# Altium PCB smart-clock-main-board.PcbDoc
Units mm, origin at the board's own origin, x right, y up, seen from the top; angles counter-clockwise.
Board outline 100 x 50 mm, 4 copper layers (Top Layer, Int1 (GND), Int2 (PWR), Bottom Layer), stack 1.369 mm thick; 26 components, 19 nets, 118 pads, 0 vias.
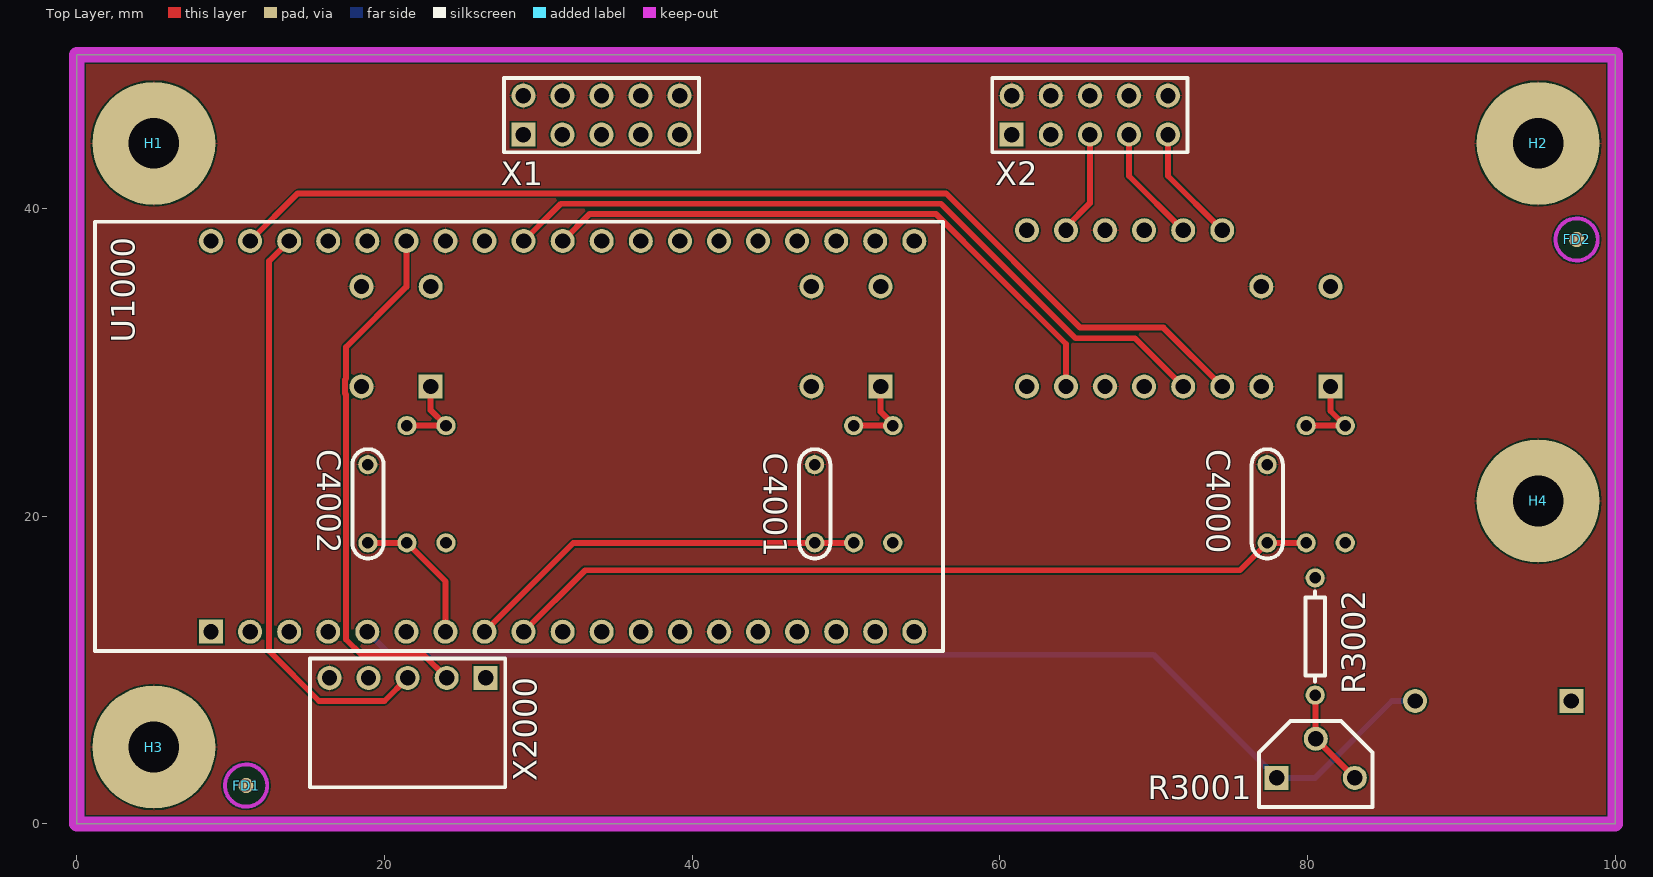
[diagram p0: Top Layer view]
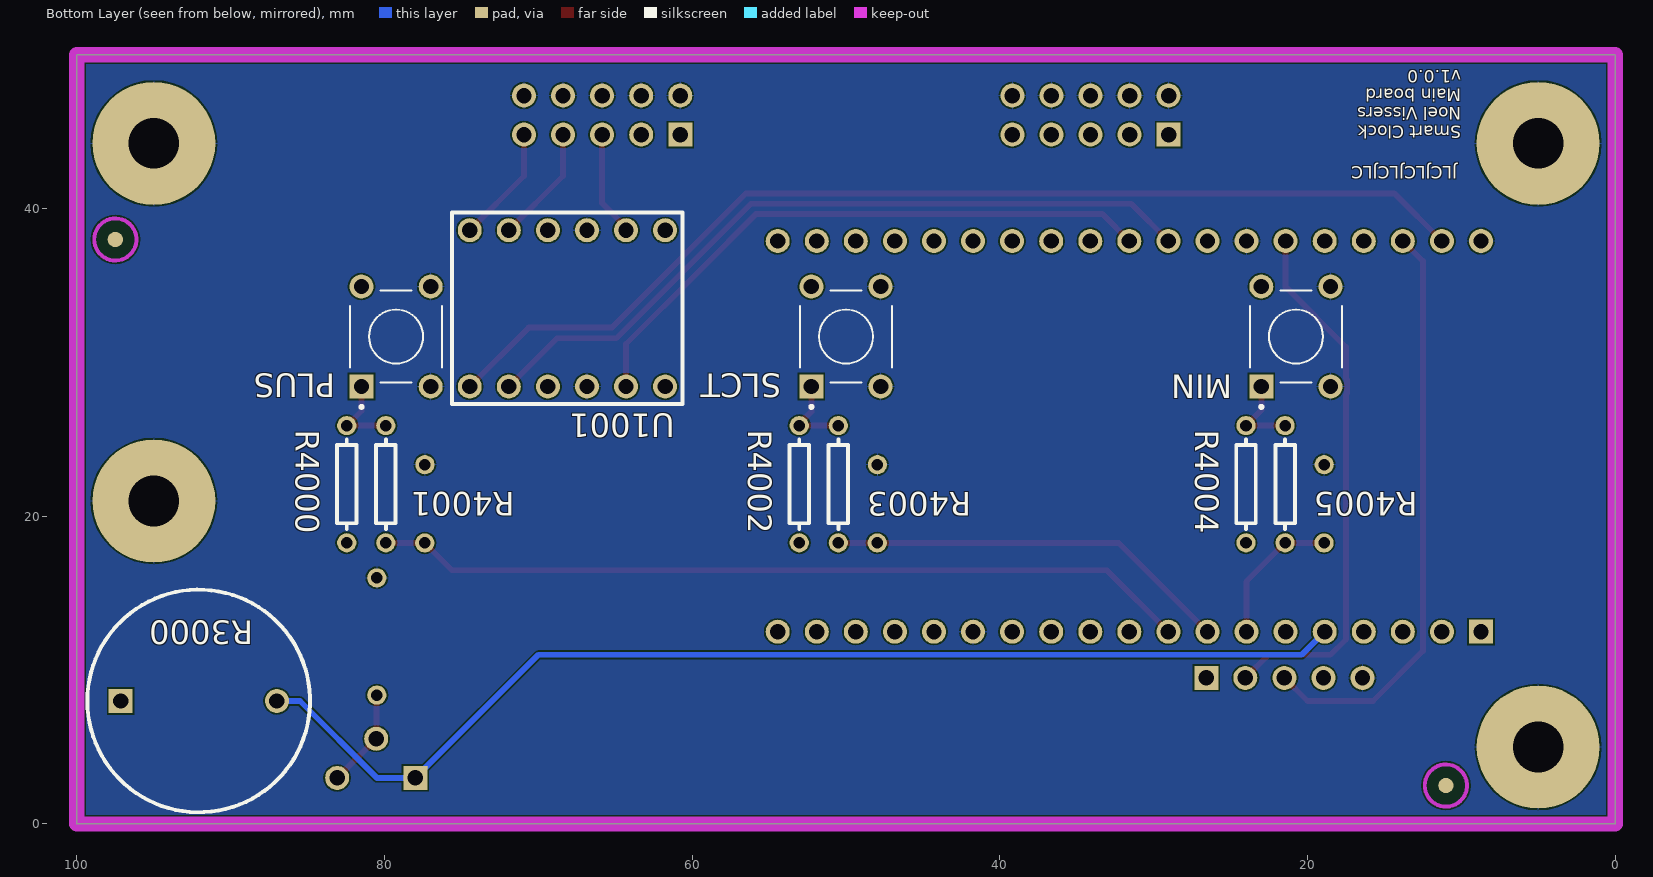
[diagram p1: Bottom Layer view, seen from below]
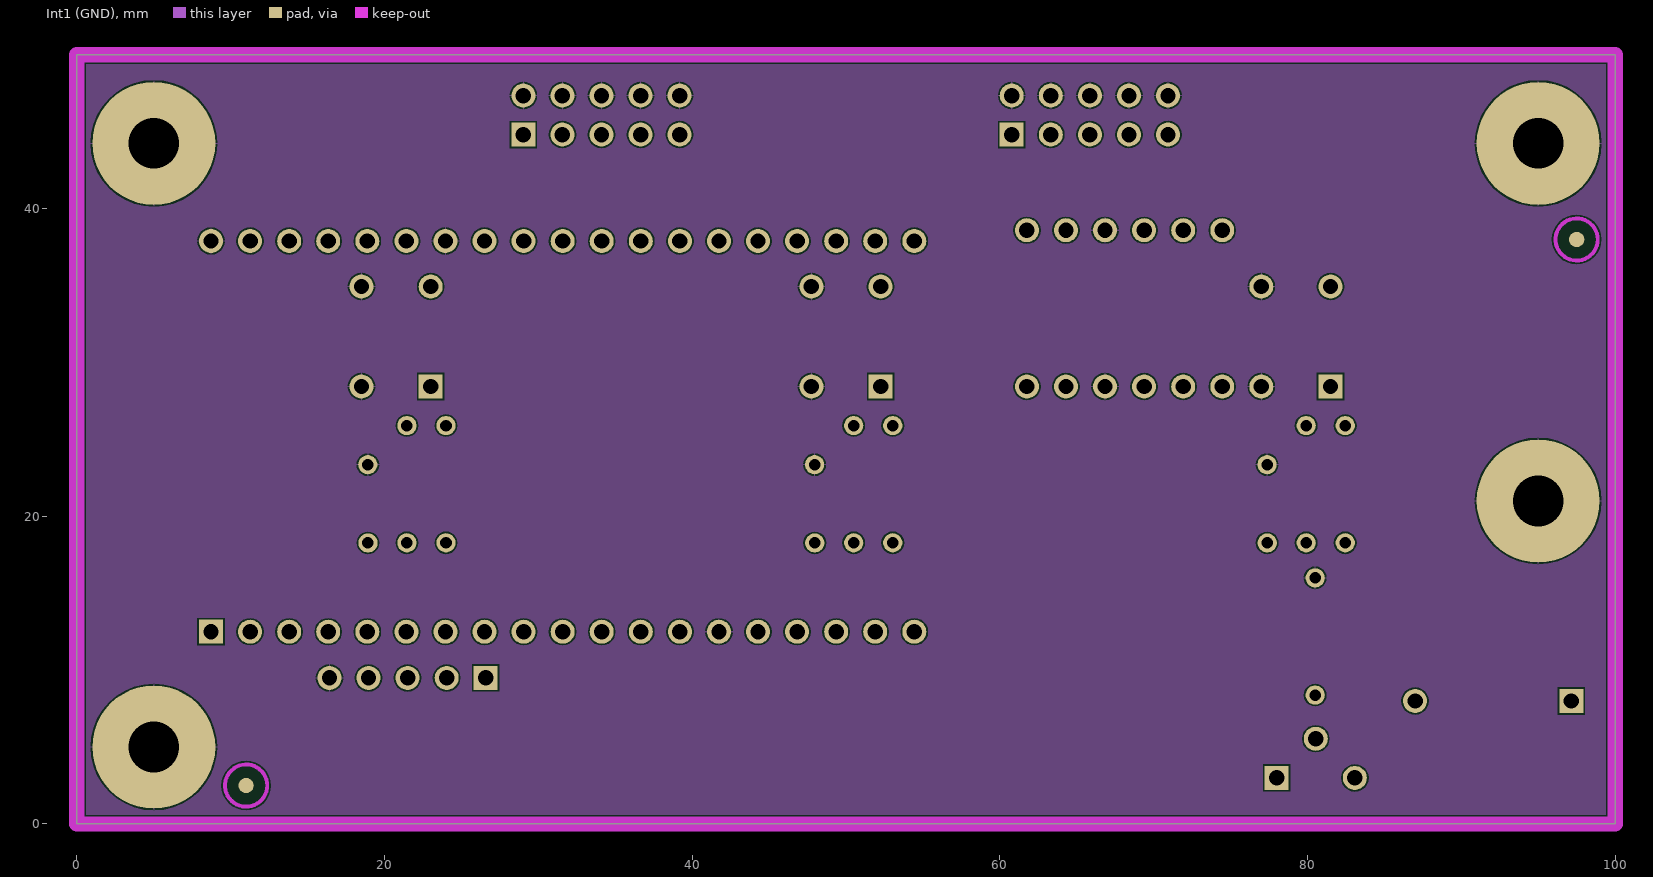
[diagram p2: Int1 (GND)]
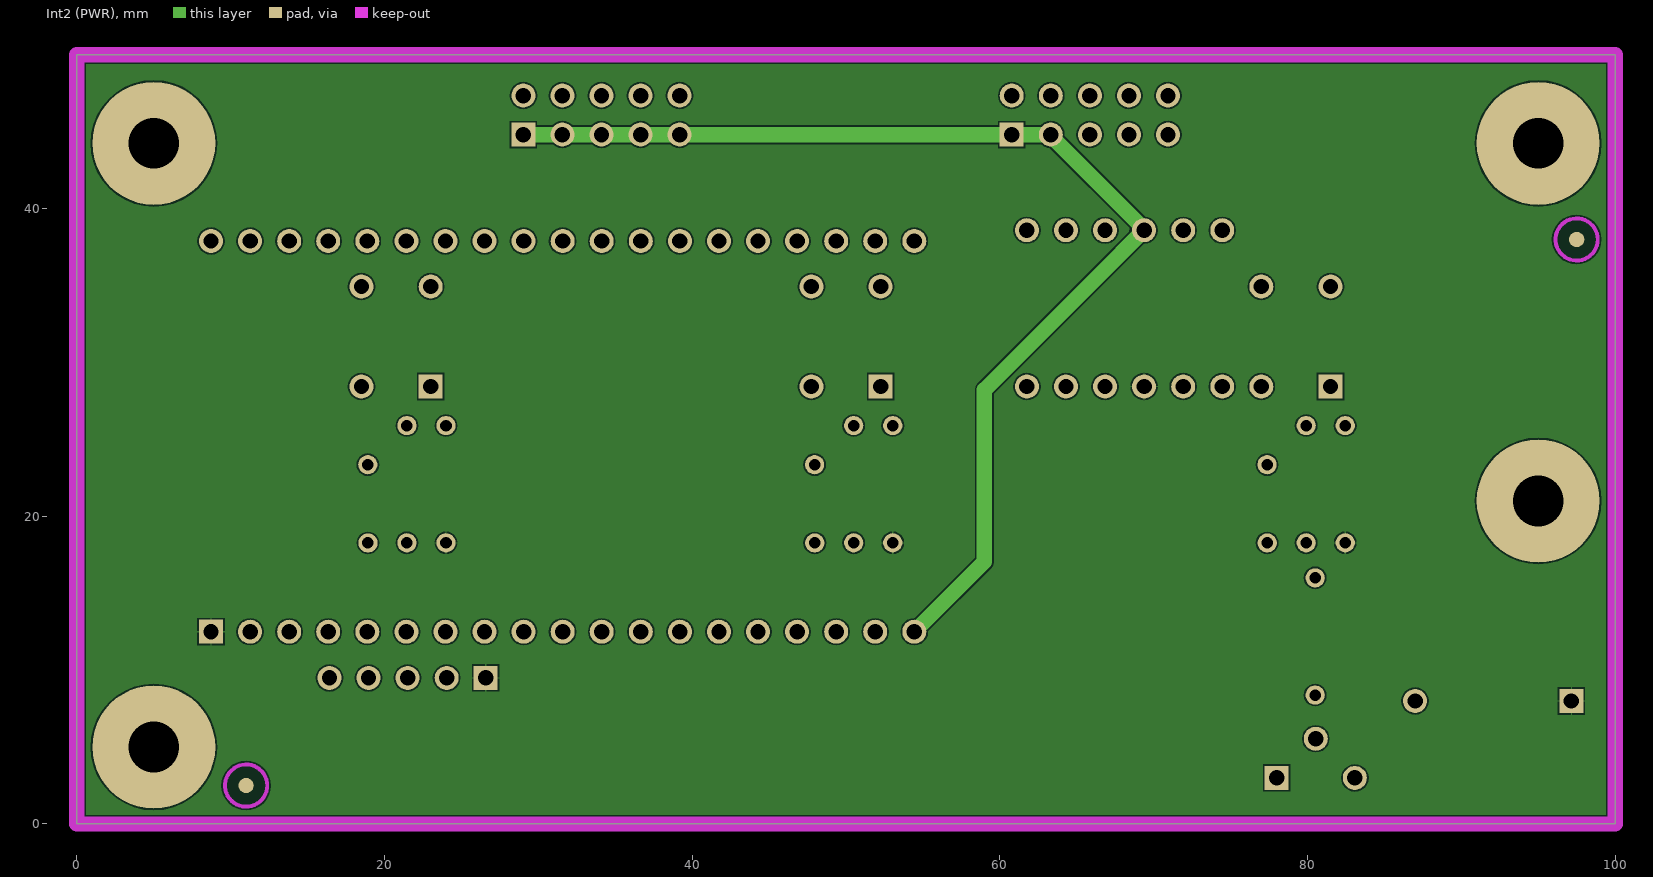
[diagram p3: Int2 (PWR)]
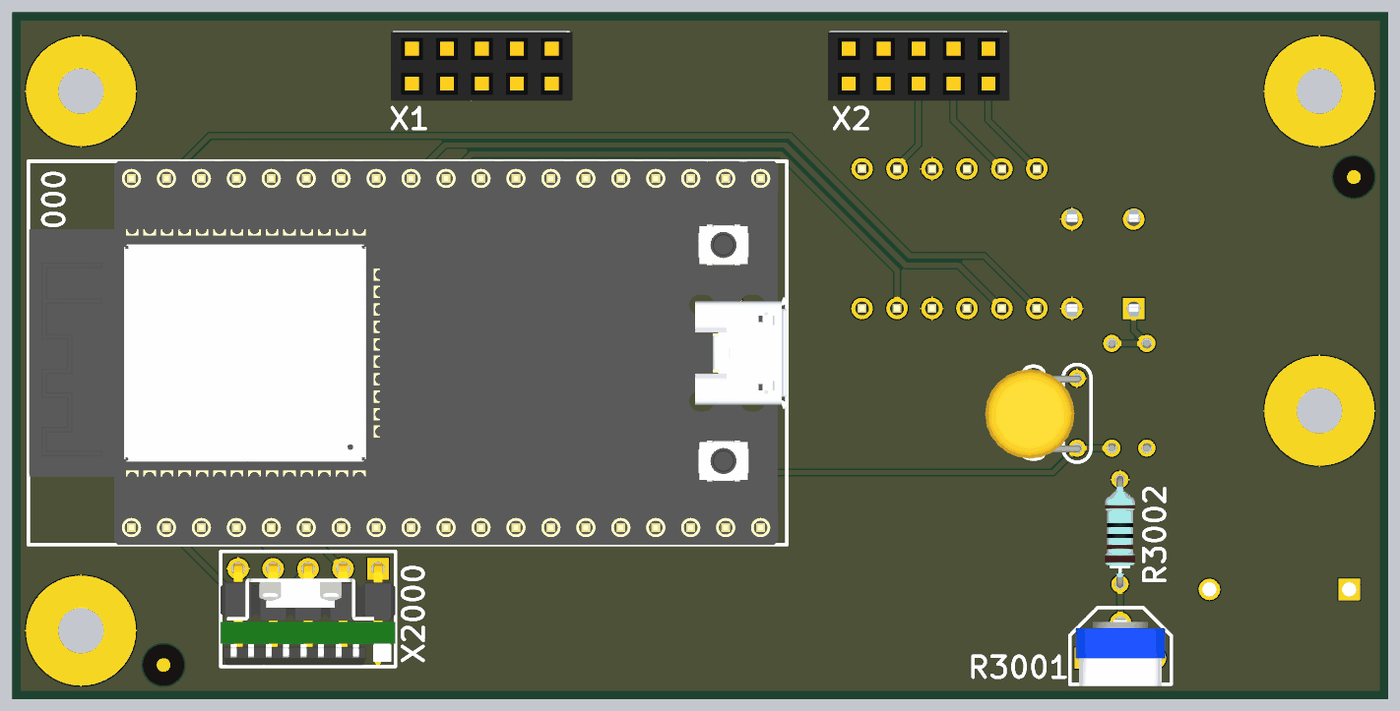
[diagram p4: 3D render of the assembled board from above, using the file's embedded part models]
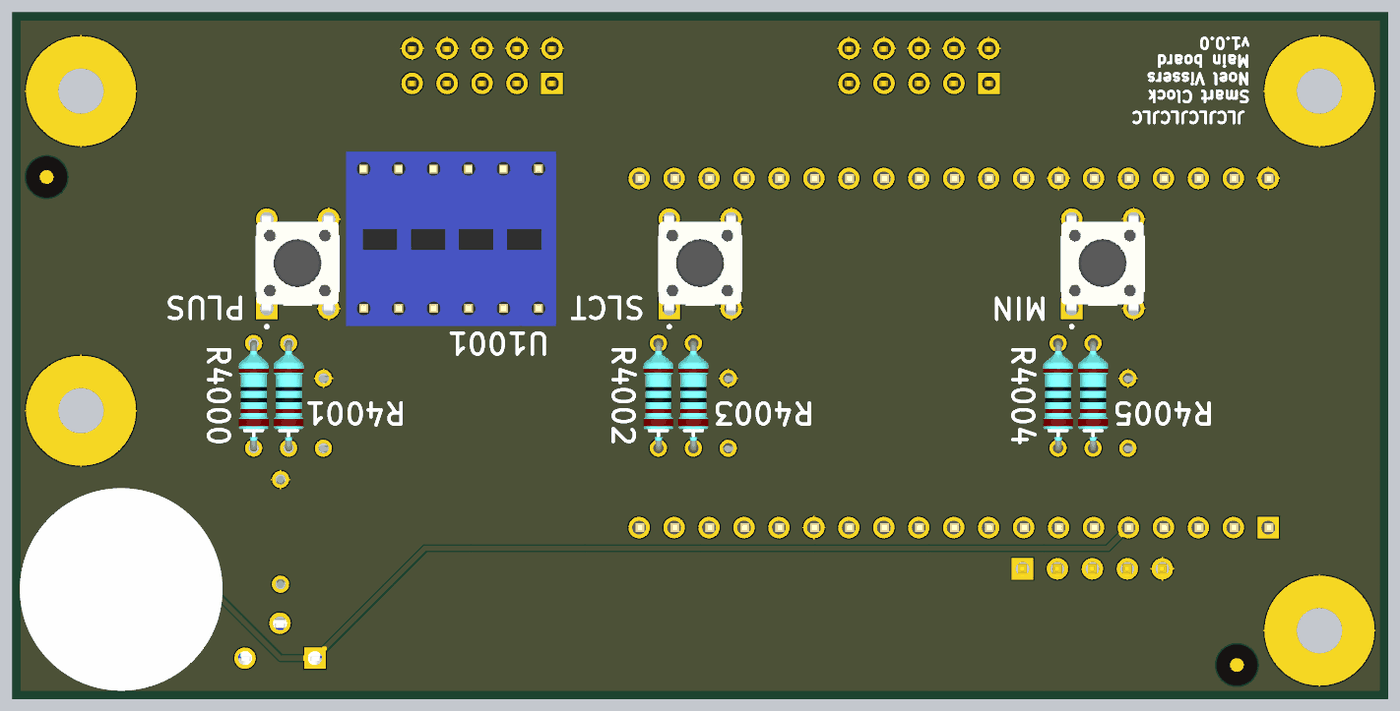
[diagram p5: 3D render of the assembled board from below, using the file's embedded part models]

## Layer stack, top to bottom
Top Solder: solder mask 0.0254, SM-001, Dk 4
Top Layer: signal copper 0.035
Dielectric 1: prepreg 0.1295, PP-017, Dk 4.3
Dielectric 2: prepreg 0.1295, PP-017, Dk 4.3
Int1 (GND): signal copper 0.035
Dielectric 3: core 0.7112, Core-039, Dk 4.8
Int2 (PWR): signal copper 0.035
Dielectric 4: prepreg 0.1295, PP-017, Dk 4.3
Dielectric 5: prepreg 0.1295, PP-017, Dk 4.3
Bottom Layer: signal copper 0.035
Bottom Solder: solder mask 0.0254, SM-001, Dk 4

## Board outline
0,0 100,0 100,50 0,50

## Design rules (kind name [scope] priority, off if disabled: settings)
BoardOutlineClearance [All] p1: gap=0.2 ignorepadtopadclearanceinfootprint=FALSE
Clearance [All] p1: gap=0.102 ignorepadtopadclearanceinfootprint=FALSE except(0.127: Arc-Via Track-Via SMDPad-Via THPad-Via Via-Via Via-Fill Via-Poly Via-Region Via-Text; 0.25: Arc-Hole Track-Hole SMDPad-Hole THPad-Hole Via-Hole Fill-Hole Poly-Hole Region-Hole Text-Hole)
ComponentClearance [All] p1: gap=0.01 collisioncheckmode=3 verticalgap=0.01 showdistances=TRUE
DiffPairsRouting [All] p1: maxlimit=0.102 minlimit=0.102 mostfreqgap=0.102 toplayer_minwidth=0.102 toplayer_maxwidth=1816.048 toplayer_prefwidth=0.102 midlayer1_minwidth=0.102 midlayer1_maxwidth=1816.048 midlayer1_prefwidth=0.102 midlayer2_minwidth=0.102 midlayer2_maxwidth=1816.048 midlayer2_prefwidth=0.102 bottomlayer_minwidth=0.102 bottomlayer_maxwidth=1816.048 bottomlayer_prefwidth=0.102 maxuncoupledlength=12.7
Height [All] p1: minheight=0 maxheight=1816.048 prefheight=12.7
HoleSize [All] p1: absolutevalues=TRUE maxlimit=6.3 minlimit=0.2 maxpercent=80.000 minpercent=20.000
HoleToHoleClearance [All] p1: gap=0.25 allowstackedmicrovias=FALSE
MinimumAnnularRing [All] p1: minimumring=0.076
MinimumSolderMaskSliver [All] p1: minsoldermaskwidth=0
PlaneClearance [All] p1: clearance=0.102
PlaneConnect PlaneConnectPowerPads [InPadClass('PowerPads')] p1: planeconnectstyle=Direct reliefexpansion=0.508 reliefentries=4 reliefconductorwidth=0.254 reliefairgap=0.254
PlaneConnect [All] p2: pad.planeconnectstyle=Relief pad.reliefexpansion=0.3 pad.reliefentries=4 pad.reliefconductorwidth=0.102 pad.reliefairgap=0.102 via.planeconnectstyle=Direct via.reliefexpansion=0.3 via.reliefentries=4 via.reliefconductorwidth=0.127 via.reliefairgap=0.127
PolygonConnect PolygonConnectPowerPads [All vs (InPadClass('PowerPads'))] p1: connectstyle=Direct reliefconductorwidth=0.254 reliefentries=4 polygonreliefangle="90 Angle" airgapwidth=0.254
PolygonConnect [All] p2: thpad.connectstyle=Relief thpad.reliefconductorwidth=0.102 thpad.reliefentries=4 thpad.polygonreliefangle="90 Angle" thpad.airgapwidth=0.102 smdpad.connectstyle=Relief smdpad.reliefconductorwidth=0.102 smdpad.reliefentries=4 smdpad.polygonreliefangle="90 Angle" smdpad.airgapwidth=0.102 via.connectstyle=Direct via.reliefconductorwidth=0.127 via.reliefentries=4 via.polygonreliefangle="90 Angle" via.airgapwidth=0.127
RoutingVias [All] p1: holewidth=0.2 width=0.45 viastyle="Through Hole" minholewidth=0.2 minwidth=0.45 maxholewidth=6.3 maxwidth=6.55
SilkToSilkClearance [All] p1: silktosilkclearance=0
SilkToSolderMaskClearance [IsPad] p1: minsilkscreentomaskgap=0.102 clearancetoexposedcopper=TRUE
SolderMaskExpansion [All] p1: expansion=0.075 istentingtop=FALSE
Width [All] p1: maxlimit=1816.048 minlimit=0.102 preferedwidth=0.102
20 further rules are at their usual default settings.

## Components (designator, comment, footprint, x,y, rotation, side; value= is the part's Value field where it differs from the comment)
C4000 "100nF" "TH-CAPACITOR - ANGLE" 77.375,18.28 r90 top
C4001 "100nF" "TH-CAPACITOR - ANGLE" 47.96,18.28 r90 top
C4002 "100nF" "TH-CAPACITOR - ANGLE" 18.915,18.28 r90 top
FD1 "FD" FD 11,2.5 r0 top
FD2 "FD" FD 97.5,38 r0 top
H1 "SIZE" HOLE#1 5,44.25 r0 top
H2 "SIZE" HOLE#2 95,38 r0 top
H3 "SIZE" HOLE#1 5,5 r0 top
H4 "SIZE" HOLE#1 95,21 r180 top
MIN "PUSHBUTTON" TH-PUSHBUTTON 23,28.44 r90 bottom
PLUS "PUSHBUTTON" TH-PUSHBUTTON 81.5,28.44 r90 bottom
R3000 "1M" TH-LDR 97.16,8 r180 bottom
R3001 "20k" POTENTIOMETER 78,3 r0 top
R3002 "1k" "AXIAL RESISTOR" 80.5,8.38 r90 top
R4000 "10k" "AXIAL RESISTOR" 82.455,18.28 r90 bottom
R4001 "1k" "AXIAL RESISTOR" 79.915,18.28 r90 bottom
R4002 "10k" "AXIAL RESISTOR" 53.04,18.28 r90 bottom
R4003 "1k" "AXIAL RESISTOR" 50.5,18.28 r90 bottom
R4004 "10k" "AXIAL RESISTOR" 23.995,18.28 r90 bottom
R4005 "1k" "AXIAL RESISTOR" 21.455,18.28 r90 bottom
SLCT "PUSHBUTTON" TH-PUSHBUTTON 52.25,28.44 r90 bottom
U1000 "ESP32-DEVKITC-32D" ESP32-DEVKITC-32D 28.48,25.2 r90 top
U1001 "LEVEL-SHIFTER" LEVEL-SHIFTER 74.46,38.6 r180 bottom
X1 "HEADER-2x5" HEADER-2x5-FEMALE 29.025,47.355 r0 top
X2 "HEADER-2x5" HEADER-2x5-FEMALE 60.775,47.355 r0 top
X2000 "DS3231" DS3231-MINI 26.58,9.5 r180 top

## Footprints (in the part's own frame and the unit in brackets; to place one, negate y for a bottom-side part, rotate by r counter-clockwise, add the part's x,y. Pads: shape width x height; smd on the part's side, far side on the other; paste and mask are expansions set on the pad)
"AXIAL RESISTOR" [mm] "STANDARD AXIAL RESISTOR"
  round 1.25 hole 0.75: 1(0,0) 2(7.62,0)
  silkscreen extent 0.89,-0.63 6.73,0.64, body extent -0.26,-1.11 7.86,1.09, height 2.28
DS3231-MINI [mm] "DS3231-MINI"
  rect 1.56x1.56 hole 1: 1(0,0)
  round 1.56 hole 1: 2(2.54,0) 3(5.08,0) 4(7.62,0) 5(10.16,0)
  silkscreen extent -1.27,-1.27 11.43,7.11, body extent -1.27,-0.33 11.43,7.03, height 15.29
ESP32-DEVKITC-32D [mm] "ESP32-DEVKITC-32D"
  rect 1.56x1.56 hole 1: 1(-12.7,19.76)
  round 1.56 hole 1: 2(-12.7,17.22) 3(-12.7,14.68) 4(-12.7,12.14) 5(-12.7,9.6) 6(-12.7,7.06) 7(-12.7,4.52) 8(-12.7,1.98) 9(-12.7,-0.56) 10(-12.7,-3.1) 11(-12.7,-5.64) 12(-12.7,-8.18) 13(-12.7,-10.72) 14(-12.7,-13.26) 15(-12.7,-15.8) 16(-12.7,-18.34) 17(-12.7,-20.88) 18(-12.7,-23.42) 19(-12.7,-25.96) 20(12.7,19.76) 21(12.7,17.22) 22(12.7,14.68) 23(12.7,12.14) 24(12.7,9.6) 25(12.7,7.06) 26(12.7,4.52) 27(12.7,1.98) 28(12.7,-0.56) 29(12.7,-3.1) 30(12.7,-5.64) 31(12.7,-8.18) 32(12.7,-10.72) 33(12.7,-13.26) 34(12.7,-15.8) 35(12.7,-18.34) 36(12.7,-20.88) 37(12.7,-23.42) 38(12.7,-25.96)
  silkscreen extent -13.95,-27.81 13.95,27.3, body extent -13.97,-27.85 13.97,27.25, height 6.81
FD [mm] "FIDUCIAL MARKER"
  round 1 all layers, no hole mask+1: 1(0,0)
  Keep-Out Layer circle w0.254: c0,0 r1.373
HEADER-2x5-FEMALE [mm] "2.54mm FEMALE HEADER - 2x5"
  rect 1.56x1.56 hole 1: 1(0,-2.54)
  round 1.56 hole 1: 2(0,0) 3(2.54,-2.54) 4(2.54,0) 5(5.08,-2.54) 6(5.08,0) 7(7.62,-2.54) 8(7.62,0) 9(10.16,-2.54) 10(10.16,0)
  silkscreen extent -1.27,-3.68 11.43,1.14, body extent -1.49,-3.8 11.71,1.2, height 8.58
HOLE#1 [mm] "M3 SCREW HOLE"
  round 8 hole 3.3: 1(0,0)
HOLE#2 [mm] "M3 SCREW HOLE"
  round 8 hole 3.3: 1(0,6.25)
LEVEL-SHIFTER [mm] "3.3V TO 5V LEVEL SHIFTER"
  round 1.56 hole 1: 1(0,0) 2(0,-10.16) 3(2.54,0) 4(2.54,-10.16) 5(5.08,0) 6(5.08,-10.16) 7(7.62,0) 8(7.62,-10.16) 9(10.16,0) 10(10.16,-10.16) 11(12.7,0) 12(12.7,-10.16)
  silkscreen extent -1.14,-11.3 13.84,1.14, body extent -1.28,-11.43 14.01,1.27, height 5.58
POTENTIOMETER [mm] "POTENTIOMETER"
  rect 1.56x1.56 hole 1: 1(0,0)
  round 1.56 hole 1: 2(2.54,2.54) 3(5.08,0)
  silkscreen extent -1.14,-1.91 6.22,3.68, body extent -0.71,-2.03 5.79,2.84, height 8.34
"TH-CAPACITOR - ANGLE" [mm] "TH-CAPACITOR - ANGLE"
  round 1.25 hole 0.75: 1(-0.009,-0.008) 2(5.08,0)
  silkscreen extent -1.02,-1.02 6.08,1.01, body extent -0.76,-0.32 5.73,6.67, height 2.64
TH-LDR [mm]
  rect 1.56x1.56 hole 1: 1(0,0)
  round 1.56 hole 1: 2(10.16,0)
  silkscreen extent -2.16,-7.24 12.32,7.24, body extent -2.18,-7.25 12.32,7.25, height 10.1
TH-PUSHBUTTON [mm] "THROUGH HOLE PUSHBUTTON"
  rect 1.56x1.56 hole 1: 1(0,0)
  round 1.56 hole 1: 2(6.5,0) 3(0,-4.5) 4(6.5,-4.5)
  silkscreen extent -1.42,-5.25 6.24,0.74, body extent -0.6,-5.23 7.2,0.76, height 5.01

## Part data
C4000 C4001 C4002: library part CAPACITOR, "GENERIC CAPACITOR"
FD1 FD2: "FIDUCIAL MARKER"
H1 H2 H3 H4: library part MOUNTING-HOLE, "M3 MOUNTING HOLE WITH SCREW AND SPACER"
R3000: library part LDR, "LIGHT DEPENDENT RESISTOR"
R3001: library part POTMETER, "POTMETER"
R3002 R4000 R4001 R4002 R4003 R4004 R4005: library part RESISTOR, "GENERIC RESISTOR"
U1000: Package=None, Availability=Unavailable, MF="Espressif Systems", MP=ESP32-DEVKITC-32D, Price=None, SnapEDA_Link=https://www.snapeda.com/parts/ESP32-DEVKITC-32D/Espressif%20Systems/view-part/2777395/?ref=snap
U1001: "BI-DIRECTIONAL LEVEL SHIFTER"
X1 X2: "2.54mm HEADER 2x5", System=Connector
X2000: library part DS3231-MINI-HEADER, "DS3231 REAL TIME CLOCK"

## Nets (pads, with @x,y where several pads share a name; then routed paths per layer and width w, separated by ;. In a path a pad name is that pad's centre, name@x,y a point inside that pad or via, vN(x,y) a via of type N, cw(c..) or ccw(c..) an arc to the next point about the centre after c; other vN are vias at no path point)
3V3_VCC: R3000.1 R4000.1 R4002.1 R4004.1 U1000.1 U1001.6 X2000.1
5V_VCC: U1000.19 U1001.5 X1.1 X1.3 X1.5 X1.7 X1.9 X2.1 X2.3 | length 75.3
  Int2 (PWR) w1: X1.1 X1.3 X1.5 X1.7 X1.9 X2.1 X2.3 63.315,44.74 69.38,38.675 U1001.5 66.386,35.606 59,28.22 59,17.06 U1000.19
CS_3V3: U1000.29 U1001.10 | length 39.7
  Top Layer w0.381: U1000.29 33.345,39.665 55.835,39.665 59.479,36.021 64.3,31.2 U1001.10
GND: C4000.2 C4001.2 C4002.2 H1.1 H2.1 H3.1 H4.1 MIN.3 MIN.4 PLUS.3 PLUS.4 R3002.2 SLCT.3 SLCT.4 U1000.14 U1000.20 U1000.26 U1001.7 U1001.8 X1.2 X1.4 X1.6 X1.8 X1.10 X2.2 X2.4 X2.6 X2.8 X2.10 X2000.5
MOSI_3V3: U1000.21 U1001.2 | length 69.7
  Top Layer w0.381: U1000.21 14.36,41 56.5,41 65.233,32.267 70.633,32.267 U1001.2
NetC4000_1: C4000.1 R4001.1 U1000.9 | length 53.3
  Top Layer w0.381: U1000.9 33.04,16.5 75.612,16.5 C4000.1 77.388,18.276 79.911,18.276 R4001.1
NetC4001_1: C4001.1 R4003.1 U1000.8 | length 26.4
  Top Layer w0.381: U1000.8 32.271,18.271 C4001.1 47.973,18.276 50.496,18.276 R4003.1
NetC4002_1: C4002.1 R4005.1 U1000.7 | length 9.4
  Top Layer w0.381: C4002.1 18.928,18.276 21.451,18.276 R4005.1 23.96,15.775 U1000.7
NetMIN_1: MIN.1 R4004.2 R4005.2 | length 5.5
  Top Layer w0.381: R4005.2 R4004.2 23,26.895 MIN.1
NetPLUS_1: PLUS.1 R4000.2 R4001.2 | length 5.5
  Top Layer w0.381: R4001.2 R4000.2 81.5,26.855 PLUS.1
NetR3000_2: R3000.2 R3001.1 U1000.5 | length 74.1
  Bottom Layer w0.381: U1000.5 20.38,11 70,11 R3001.1 80.5,3 85.5,8 R3000.2
NetR3001_2: R3001.2 R3001.3 R3002.1 | length 6.4
  Top Layer w0.381: R3002.1 80.52,8.36 80.52,5.56 R3001.2 R3001.3
NetR4002_2: R4002.2 R4003.2 SLCT.1 | length 5.4
  Top Layer w0.381: R4003.2 R4002.2 53.04,26.012 52.25,26.802 SLCT.1
NetU1000_22: U1000.22 X2000.3 | length 38.2
  Top Layer w0.381: U1000.22 12.5,36.6 12.5,11.24 15.74,8 20,8 X2000.3
NetU1000_25: U1000.25 X2000.2 | length 35.2
  Top Layer w0.381: U1000.25 21.42,34.92 17.5,31 17.5,28.956 17.428,28.884 17.428,27.996 17.5,27.924 17.5,12 18.5,11 22.54,11 X2000.2
NetU1001_1: U1001.1 X2.9 | length 7.7
  Top Layer w0.381: X2.9 70.935,42.125 U1001.1
NetU1001_3: U1001.3 X2.7 | length 7.7
  Top Layer w0.381: X2.7 68.395,42.125 U1001.3
NetU1001_9: U1001.9 X2.5 | length 6.9
  Top Layer w0.381: U1001.9 64.3,38.8 65.855,40.355 X2.5
SCK_3V3: U1000.28 U1001.4 | length 48.8
  Top Layer w0.381: U1000.28 31.465,40.325 56.175,40.325 64.925,31.575 68.785,31.575 U1001.4
pads on no net: FD1.1 FD2.1 MIN.2 PLUS.2 SLCT.2 U1000.2 U1000.3 U1000.4 U1000.6 U1000.10 U1000.11 U1000.12 U1000.13 U1000.15 U1000.16 U1000.17 U1000.18 U1000.23 U1000.24 U1000.27 U1000.30 U1000.31 U1000.32 U1000.33 U1000.34 U1000.35 U1000.36 U1000.37 U1000.38 U1001.11 U1001.12 X2000.4

## Polygon pours and split planes (outlines as drawn)
GND on Int1 (GND) "GND_L02_P008" (solid, remove dead copper, pour order 8): 47,4
GND on Int1 (GND) "GND_L02_P007" (solid, remove dead copper, pour order 7): 47,5
GND on Int1 (GND) "GND_L02_P006" (solid, remove dead copper, pour order 6): 0,50 100,50 100,0 0,0
GND on Int1 (GND) "GND_L02_P003" (solid, remove dead copper, pour order 3): 93,12
GND on Int1 (GND) "GND_L02_P001" (solid, remove dead copper, pour order 1): 11,0
GND on Top Layer "GND_L01_P010" (solid, remove dead copper, pour order 10): 0,50 100,50 100,0 0,0
GND on Top Layer "GND_L01_P005" (solid, remove dead copper, pour order 5): 94,65
3V3_VCC on Int2 (PWR) "3V3_VCC_L03_P009" (solid, remove dead copper, pour order 9): 0,50 100,50 100,0 0,0
GND on Bottom Layer "GND_L04_P011" (solid, remove dead copper, pour order 11): 0,50 100,50 100,0 0,0

## Keep-outs
Keep-Out Layer:
  the board outline again, w1

## Silkscreen, mask and mechanical layers (free items; w line width, h text height)
Bottom Overlay:
  text "Smart Clock  / Noel Vissers / Main board / v1.0.0" at 10,49 h0.8 r180
  text "JLCJLCJLCJLC" at 10.25,42.75 h0.8 r180
Mechanical 1:
  lines w1: 0,50 99.999,50 100,50 100,0 0,0 0,49.999 ; 0,50 0,49.999
  text ".Pcb_File_Name_No_Path" at 0.254,52.254 h1.52

## Dimensions
0,50 to 99.999,50 on Dimensions
0,0 to 0,50 on Dimensions